# Altium PCB PCB_Jacob's-NFC-Card-(Schematic)_2026-05-09.pcbdoc
Units mil, origin at the board's own origin, x right, y up, seen from the top; angles counter-clockwise.
Board outline 4509.99 x 3010 mil, 2 copper layers (Top Layer, Bottom Layer); 10 components, 9 nets, 16 pads, 3 vias.
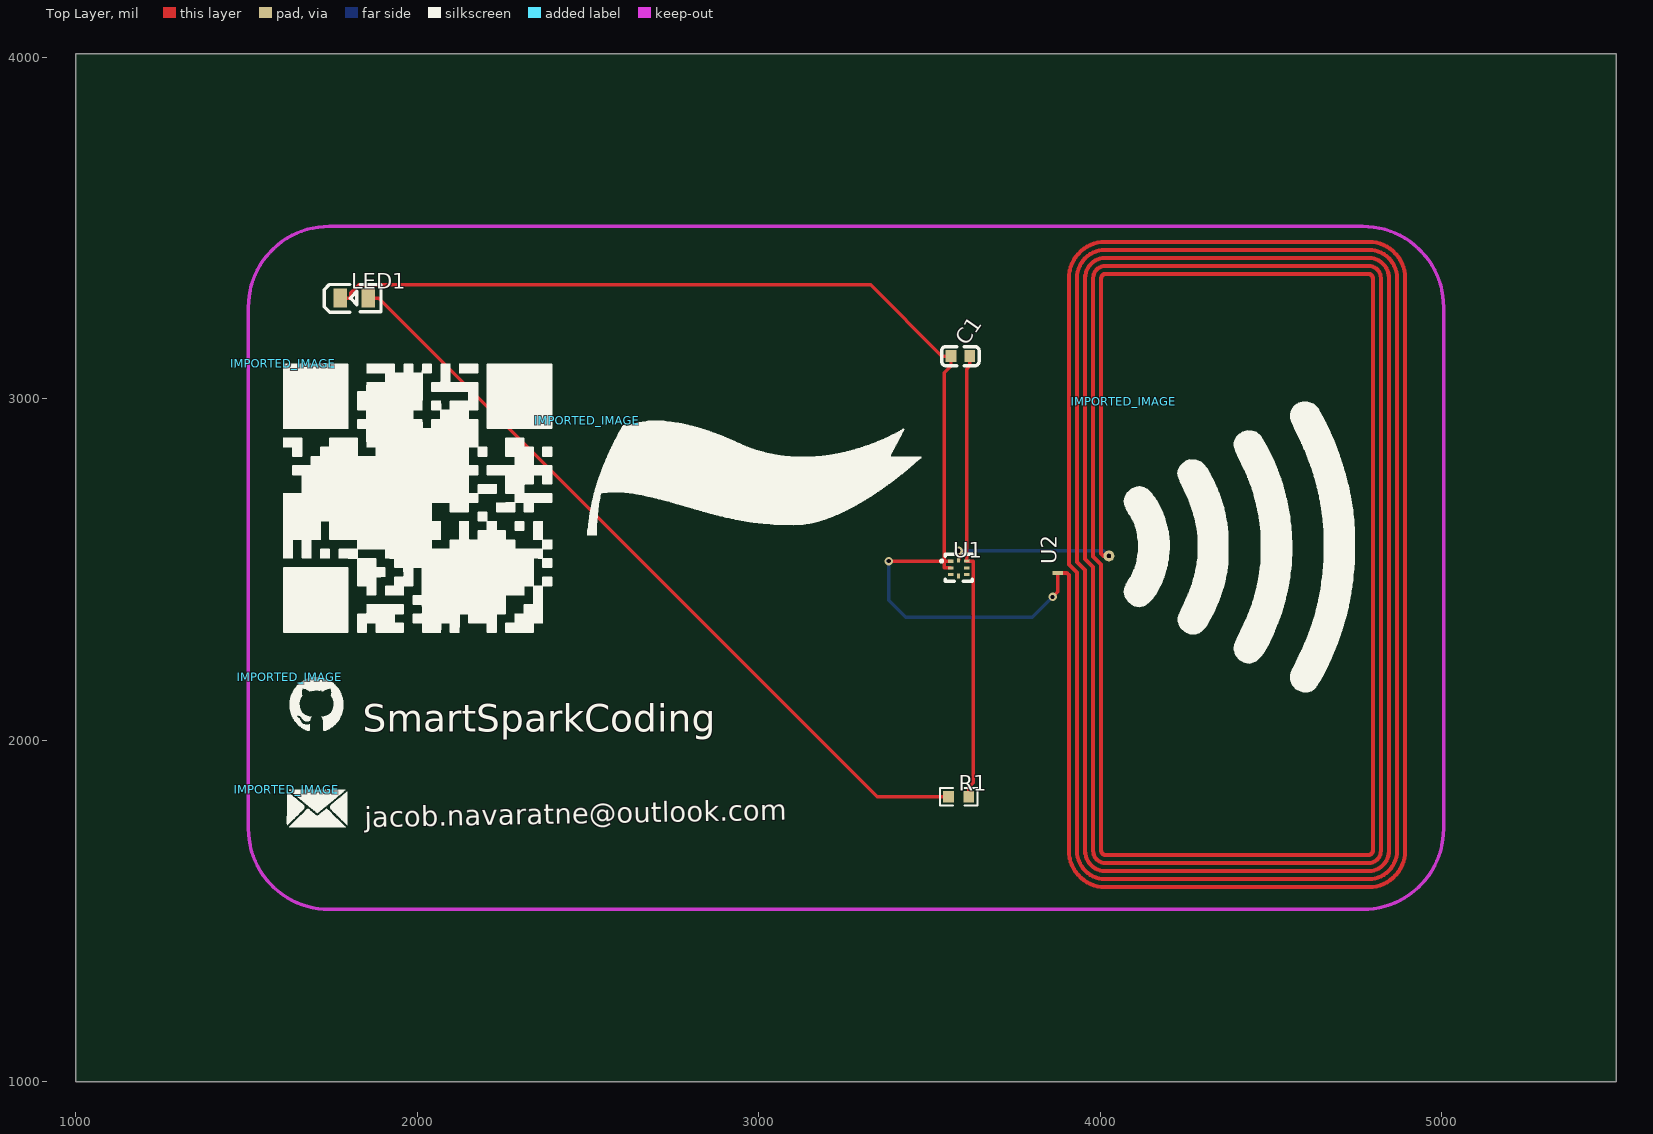
[diagram p0: Top Layer view]
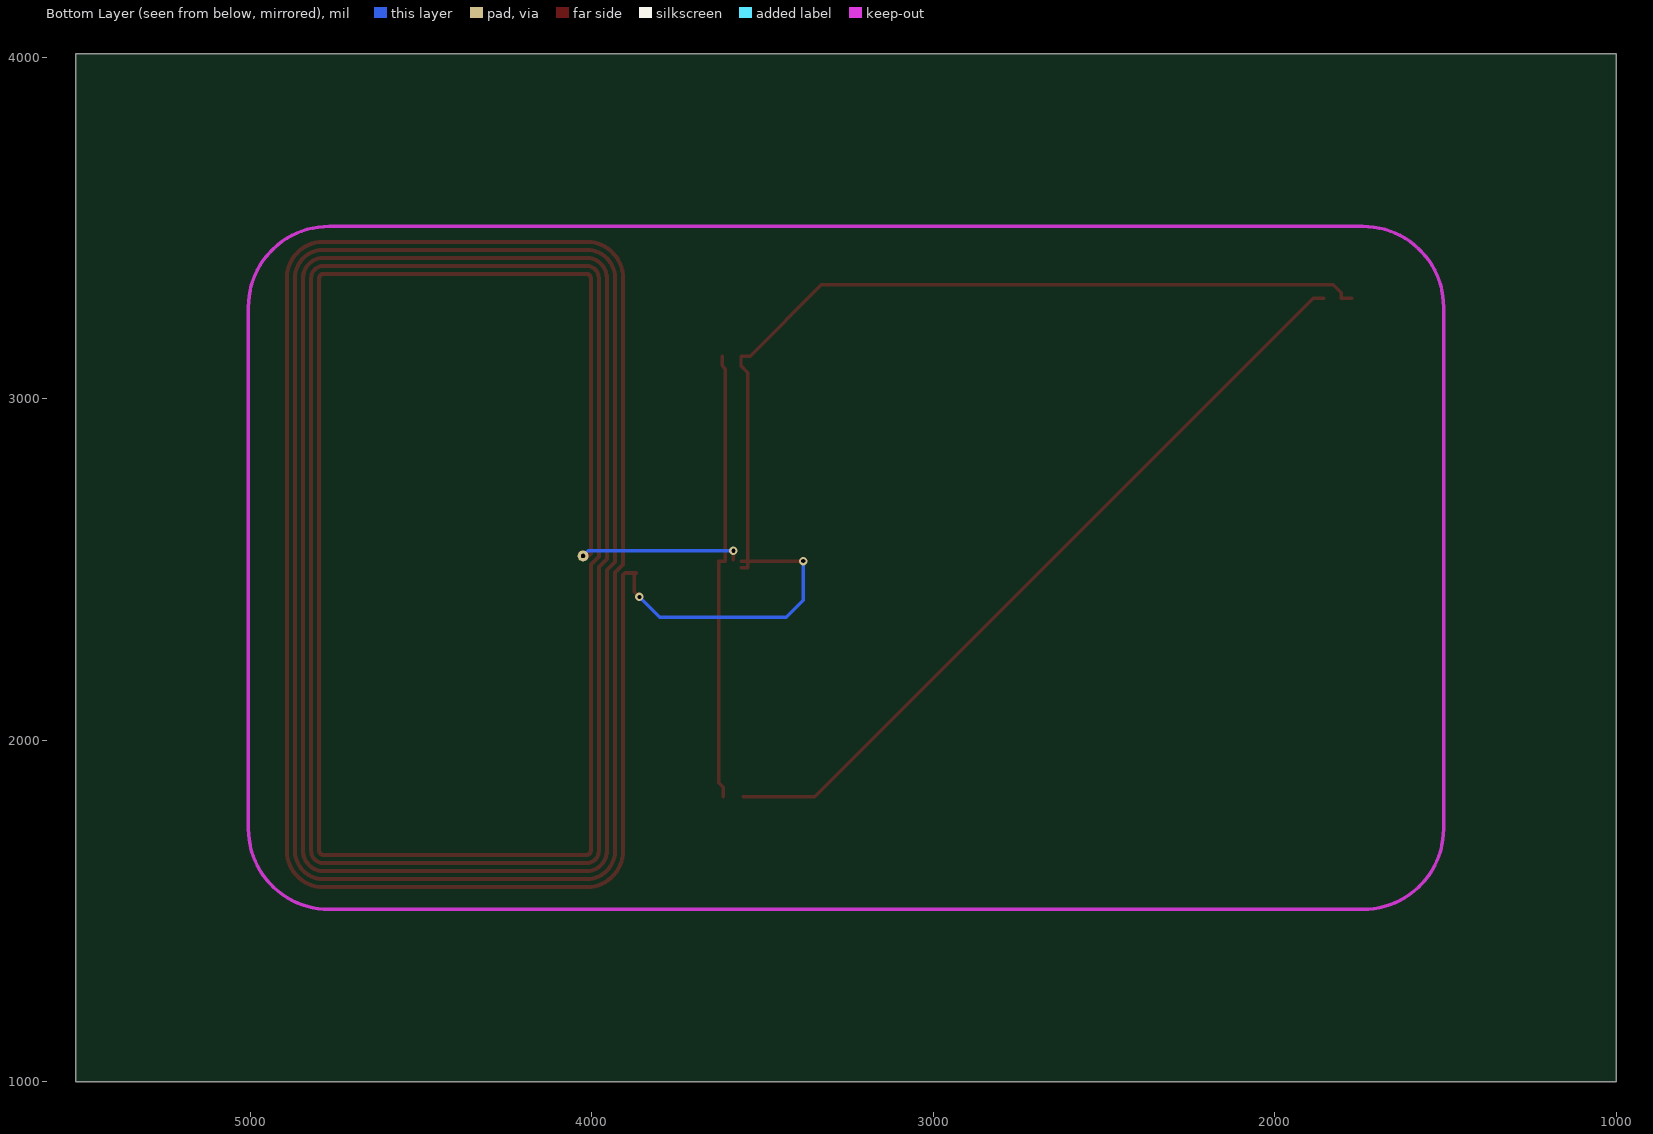
[diagram p1: Bottom Layer view, seen from below]

## Layer stack, top to bottom
Top Layer: signal copper (thickness not stored)
Dielectric: dielectric 12.6, FR-4, Dk 4.8
Bottom Layer: signal copper (thickness not stored)

## Board outline
5509.99,1000 1000,1000 1000,4010 5509.99,4010

## Components (designator, comment, footprint, x,y, rotation, side; value= is the part's Value field where it differs from the comment)
C1 "220nF" C0603 3590,3125 r0 top
IMPORTED_IMAGE "IMPORTED_IMAGE" IMPORTED_IMAGE 1606.93,3103.07 r0 top
IMPORTED_IMAGE "IMPORTED_IMAGE" IMPORTED_IMAGE 2497.79,2935.43 r0 top
IMPORTED_IMAGE "IMPORTED_IMAGE" IMPORTED_IMAGE 4068.92,2991.92 r0 top
IMPORTED_IMAGE "IMPORTED_IMAGE" IMPORTED_IMAGE 1625.77,2185.07 r0 top
IMPORTED_IMAGE "IMPORTED_IMAGE" IMPORTED_IMAGE 1618.06,1855.16 r0 top
LED1 "17-21SUYC/TR8" LED0805-R-RD 1815,3295 r0 top
R1 "47Ω" R0603 3585,1835 r0 top
U1 "NT3H2111W0FHKH" XQFN-8_L1.6-W1.6-P0.50-BL_NT3H2111W0FHKH 3585,2505 r0 top
U2 "Antenna" 25X48MM_NFC_ANTENNA 4400,2515 r90 top

## Footprints (in the part's own frame and the unit in brackets; to place one, negate y for a bottom-side part, rotate by r counter-clockwise, add the part's x,y. Pads: shape width x height; smd on the part's side, far side on the other; paste and mask are expansions set on the pad)
25X48MM_NFC_ANTENNA [mil]
  rect 11.81x29.53 smd paste+0 mask+2: P$1(-25,525)
  round 31.81 hole 11.82 paste+0 mask+2: P$2(25,375)
  Top Layer lines w11.81: -25,530 -25,525 -25,498.62 -31.5,492.13 -838.58,492.13 ccw(c-838.58,385.83) -944.88,385.83 -944.88,-385.83 ccw(c-838.58,-385.83) -838.58,-492.13 ; 25,375 25,391.14 31.5,397.64 838.58,397.64 cw(c838.58,385.83) 850.39,385.83 850.39,-385.83 cw(c838.58,-385.83) 838.58,-397.64 -838.58,-397.64 cw(c-838.58,-385.83) -850.39,-385.83 -850.39,385.83 cw(c-838.58,385.83) -838.58,397.64 0,397.64 23.62,421.26 838.58,421.26 cw(c838.58,385.83) 874.01,385.83 874.01,-385.83 cw(c838.58,-385.83) 838.58,-421.26 -838.58,-421.26 cw(c-838.58,-385.83) -874.01,-385.83 -874.01,385.83 cw(c-838.58,385.83) -838.58,421.26 -7.87,421.26 15.75,444.88 838.58,444.88 cw(c838.59,385.83) 897.64,385.83 897.64,-385.83 cw(c838.59,-385.83) 838.58,-444.88 -838.58,-444.88 cw(c-838.59,-385.83) -897.64,-385.83 -897.64,385.83 cw(c-838.59,385.83) -838.58,444.88 -15.75,444.88 7.87,468.5 838.58,468.5 cw(c838.58,385.82) 921.26,385.83 921.26,-385.83 cw(c838.58,-385.82) 838.58,-468.5 -838.58,-468.5 cw(c-838.58,-385.82) -921.26,-385.83 -921.26,385.83 cw(c-838.58,385.82) -838.58,468.5 -23.62,468.5 0,492.13 838.58,492.13 cw(c838.58,385.83) 944.88,385.83 944.88,-385.83 cw(c838.58,-385.83) 838.58,-492.13 ; -838.58,-492.12 838.58,-492.12
C0603 [mm]
  rect 0.8x0.9 smd paste+0 mask+0.051: 1(-0.7,0) 2(0.7,0)
  silkscreen extent -1.39,-0.71 1.39,0.71
IMPORTED_IMAGE [mil]
  silkscreen extent 0,-787 787,0
LED0805-R-RD [mm]
  rect 1x1.4 smd paste+0 mask+0.051: 1(1.05,0) 2(-1.05,0)
  silkscreen extent -2.22,-1.04 1.99,1.01
R0603 [mil]
  rect 31.75x34.02 smd paste-3937.01 mask+2: 1(-29.66,0) 2(29.66,0)
  silkscreen extent -55,-26 55,26
XQFN-8_L1.6-W1.6-P0.50-BL_NT3H2111W0FHKH [mm]
  rect 0.4x0.28 smd paste+0 mask+0.051: 1(-0.6,0.5)
  rect 0.4x0.22 smd paste+0 mask+0.051: 2(-0.6,0) 3(-0.6,-0.5) 5(0.6,-0.5) 6(0.6,0) 7(0.6,0.5)
  rect 0.22x0.4 smd paste+0 mask+0.051: 4(0,-0.6) 8(0,0.6)
  silkscreen extent -1.33,-1 1,1

## Via types
v1: diameter 24.41, hole 12.2, Top Layer to Bottom Layer, tented both sides, 2 vias
v2: diameter 24, hole 12, Top Layer to Bottom Layer, tented both sides, 1 vias

## Nets (pads, with @x,y where several pads share a name; then routed paths per layer and width w, separated by ;. In a path a pad name is that pad's centre, name@x,y a point inside that pad or via, vN(x,y) a via of type N, cw(c..) or ccw(c..) an arc to the next point about the centre after c; other vN are vias at no path point)
R1_1: LED1.1 R1.1 | length 2303.7
  Top Layer w10: LED1.1 1887.05,3295 3347.05,1835 R1.1
U1_1: U1.1 U2.P$1 | length 897.8
  Top Layer w10: v1(3380,2524.67) U1.1 ; v1(3860,2420) 3875,2435 U2.P$1
  Bottom Layer w10: v1(3380,2524.67) 3380,2410 3430,2360 3800,2360 v1(3860,2420)
U1_2: C1.1 LED1.2 U1.2 | length 2547.4
  Top Layer w10: LED1.2 1804.35,3295 1804.35,3310.35 1827.61,3333.61 3327.07,3333.61 3535.68,3125 C1.1 3562.44,3096.27 3542.44,3076.27 3542.44,2505.05 3542.49,2505 U1.2
U1_3: U1.3
U1_4: U1.4
U1_5: U1.5
U1_6: U1.6
U1_7: C1.2 R1.2 U1.7 | length 1318
  Top Layer w10: R1.2 3614.66,1863.02 3627.56,1875.92 3627.56,2524.63 3627.51,2524.68 U1.7 3608.62,3087.33 3617.56,3096.27 C1.2
U1_8: U1.8 U2.P$2 | length 1323.8
  Top Layer w10: U1.8 v2(3585,2555.15) ; 4014.17,3365.39 4014.08,3365.39 4013.11,3365.34 4012.15,3365.22 4011.2,3365.01 4010.27,3364.73 4009.37,3364.37 4008.5,3363.94 4007.66,3363.44 4006.88,3362.87 4006.14,3362.24 4005.45,3361.55 4004.83,3360.8 4004.27,3360.01 4003.77,3359.18 4003.35,3358.3 4002.99,3357.4 4002.72,3356.47 4002.52,3355.52 4002.4,3354.55 4002.36,3353.58 4002.36,2546.5 4008.86,2540 U2.P$2
  Bottom Layer w10: v2(3585,2555.15) 4009.85,2555.15 U2.P$2

## Keep-outs
Keep-Out Layer:
  lines w10: 1505,1741.22 ccw(c1741.22,1741.22) 1741.22,1505 ; 1505,3268.78 cw(c1741.22,3268.78) 1741.22,3505 ; 4768.77,1505 ccw(c4768.77,1741.22) 5004.99,1741.22 ; 4768.77,3505 cw(c4768.77,3268.78) 5004.99,3268.78

## Silkscreen, mask and mechanical layers (free items; w line width, h text height)
Top Overlay:
  text "SmartSparkCoding" at 1840,2025 h80
  text "jacob.navaratne@outlook.com" at 1845.52,1745.47 h59.05 r1